# EAGLE board 8266_relay (EAGLE 6.6.0)
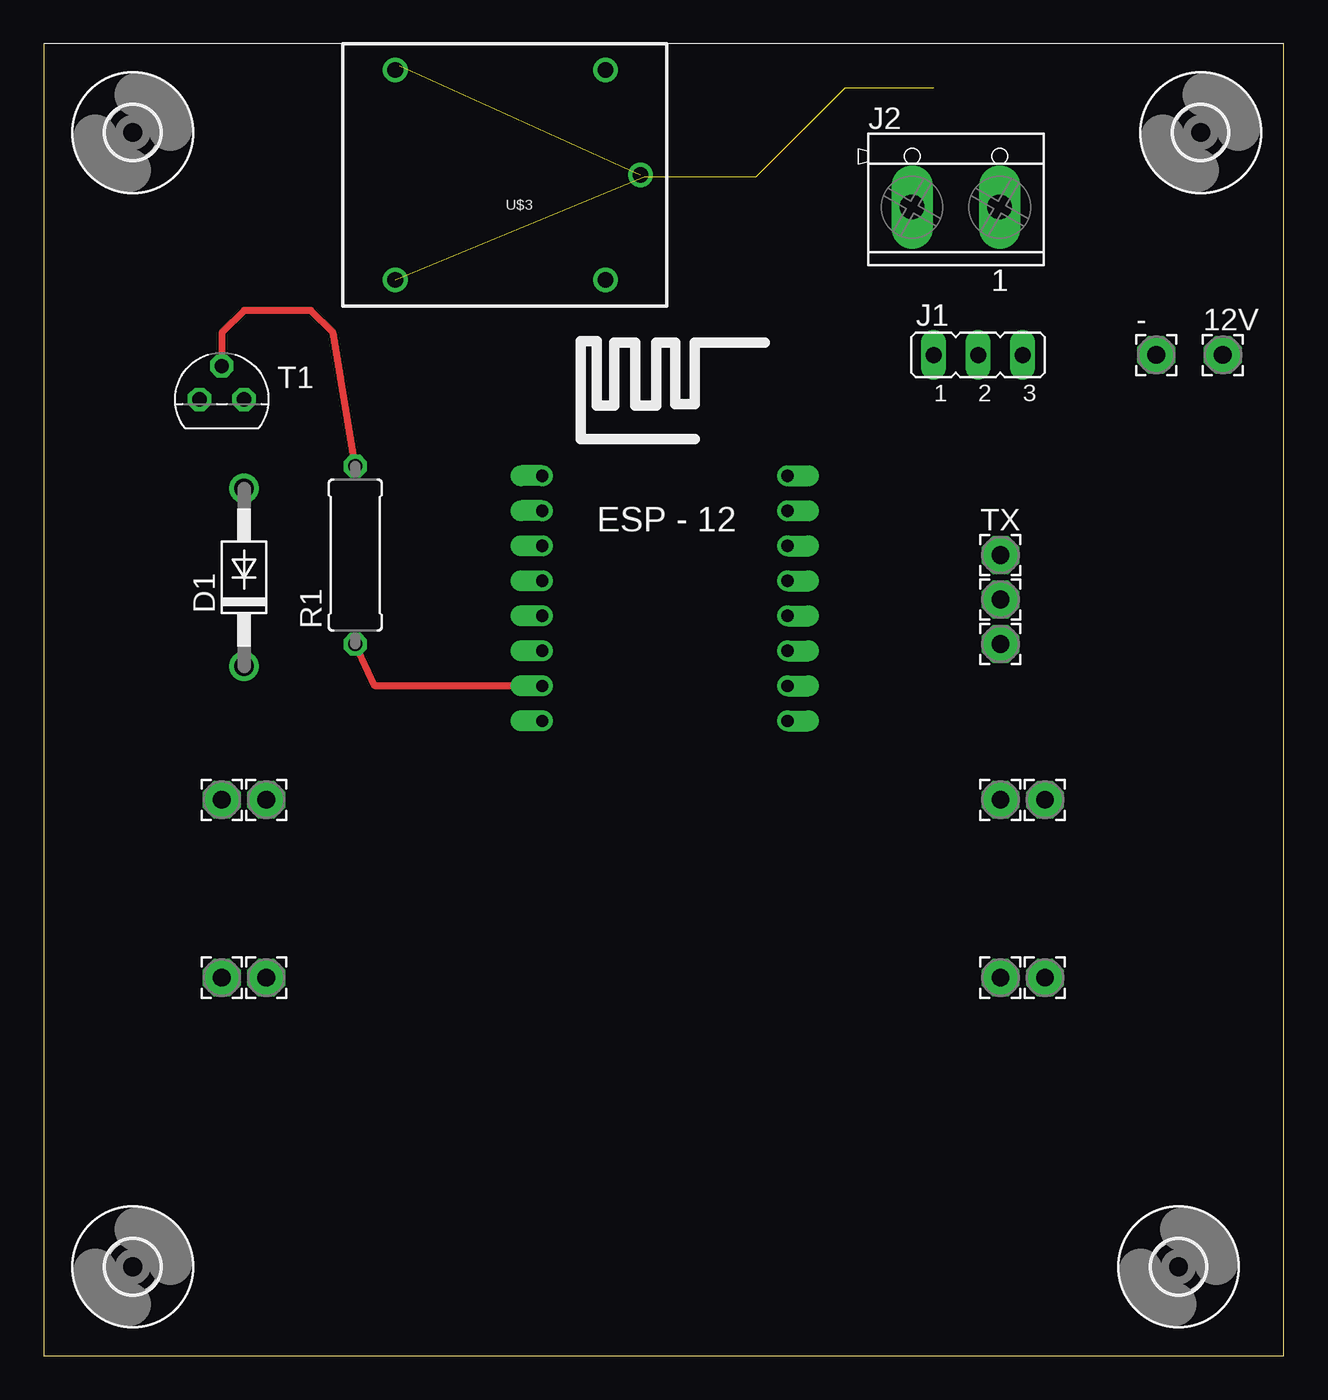
[diagram p0: board, top side]
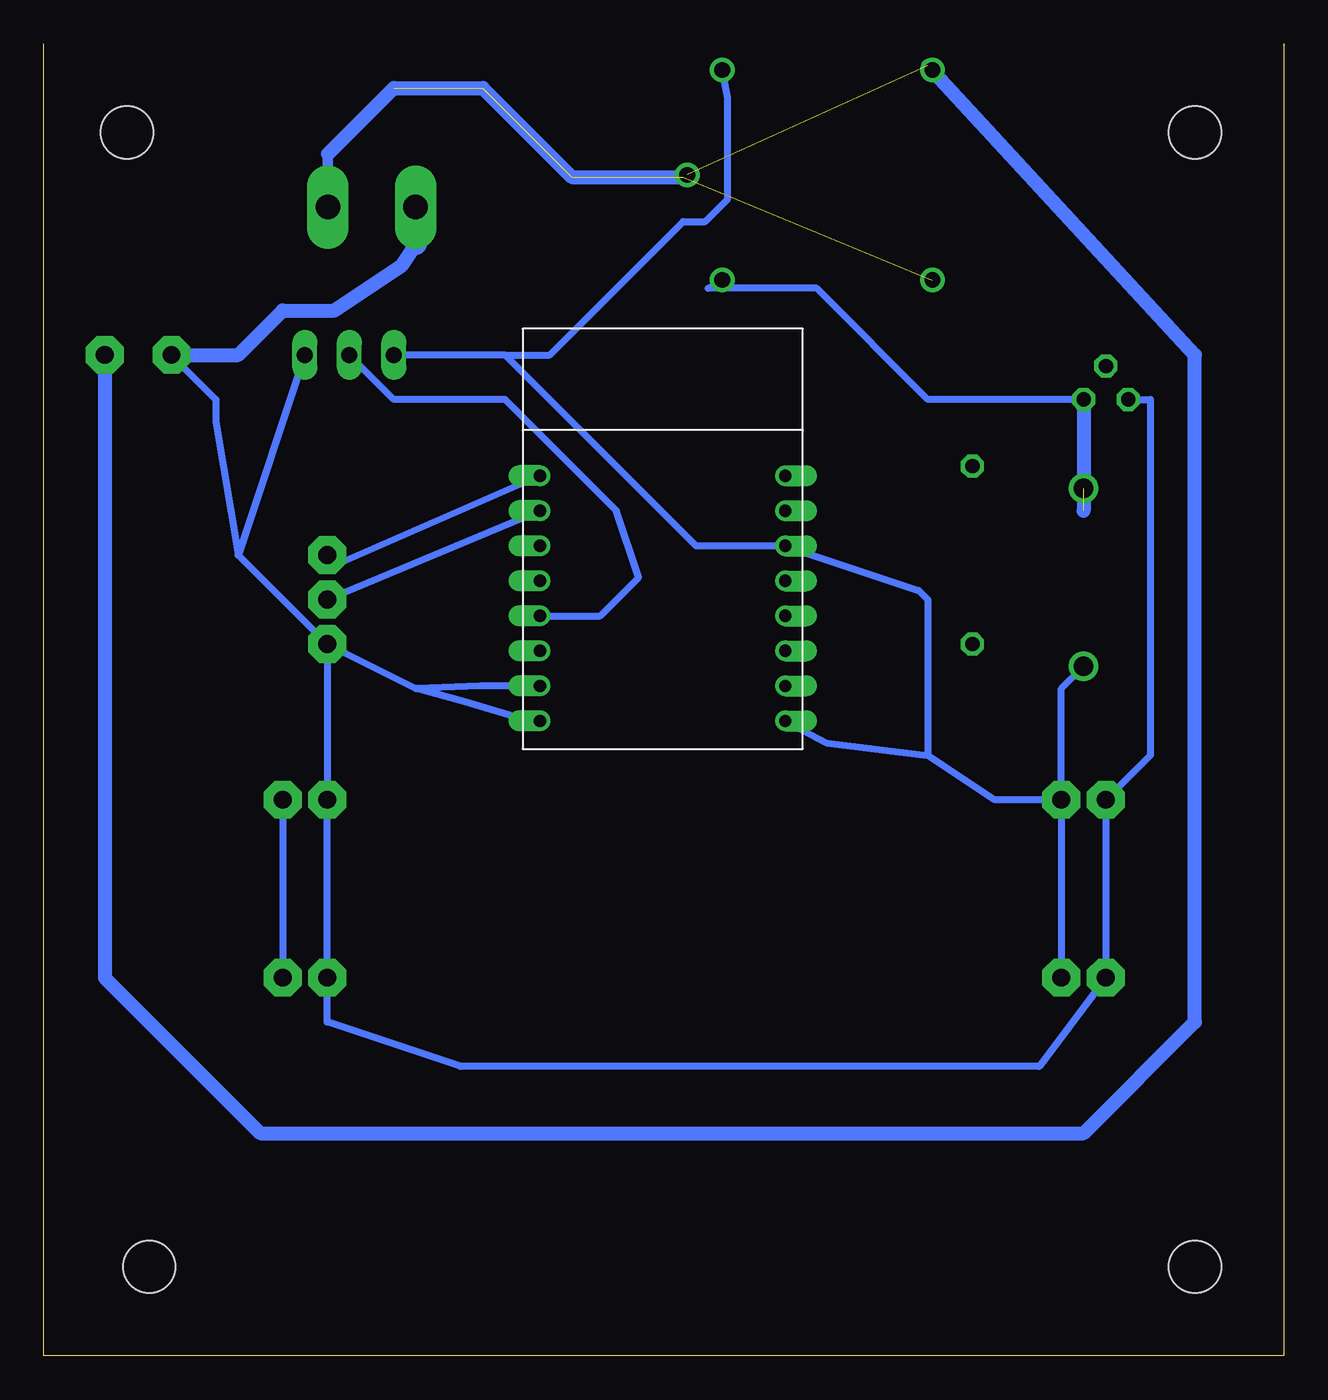
[diagram p1: board, bottom side, seen from below]

Size 70.79 x 74.92 mm. Coordinates in mm from the lower left corner, seen from the top.
Outline: 70.79,74.92 70.79,0 0,0 0,74.92
Copper layers (1*16): Top 0.035mm / dielectric 1.5mm / Bottom 0.035mm
Design rules "default *": minimum track width 10mil, minimum drill 13mil, track to track 8mil, track to pad 8mil, pad to pad 8mil, via to via 8mil, smd to smd 8mil, copper to edge 40mil, drill to drill 8mil, minimum pad ring 10mil, minimum via ring 8mil, stop-mask expansion 4mil, vias tented up to drill 0mil, thermal gap 10mil

## Footprints (pad centres in the part's own frame; a part is rotated, then mirrored left to right if it is on the bottom)
2,15/1,0 = drill 1.016 pad 2.159 octagon: 1 0,0
DO41-10 = drill 1.118: A 5.08,0; C -5.08,0
JP2 = drill 0.914 long: 1 -2.54,0; 2 0,0; 3 2.54,0
TERMINAL_BLOCK_2P_5 = drill 1.4 pad 2.38 long: 1 2.5,-0.45; 2 -2.5,-0.45
0309/10 = drill 0.813 octagon: 1 -5.08,0; 2 5.08,0
TO92 = drill 0.813 octagon: 1 1.27,0; 2 0,1.905; 3 -1.27,0
3,0 = hole 3: 0,0
SRD-05VDC-SL-C = drill 0.9: COIL0 -5.39,-6.12; COIL1 -5.39,5.88; SWCLOSED 6.61,-6.12; SWCOMMON -7.39,-0.12; SWOPEN 6.61,5.88
ESP12 = drill 0.7 offset: ADC -7.1,3.8; CH_PD -7.1,1.8; GND 6.9,-8.2; GPIO0 6.9,-2.2; GPIO2 6.9,-4.2; GPIO4 6.9,1.8; GPIO5 6.9,-0.2; GPIO12 -7.1,-4.2; GPIO13 -7.1,-6.2; GPIO14 -7.1,-2.2; GPIO15 6.9,-6.2; GPIO16 -7.1,-0.2; RESET -7.1,5.8; RX 6.9,3.8; TX 6.9,5.8; VCC -7.1,-8.2

## Placement (x,y rotation side)
3.3V_1  [2,15/1,0]  12.7,21.59 0 top
3.3V_2  [2,15/1,0]  12.7,31.75 0 top
5V  [2,15/1,0]  57.15,31.75 0 top
5V_2  [2,15/1,0]  57.15,21.59 0 top
12V  [2,15/1,0]  67.31,57.15 0 top
-  [2,15/1,0]  63.5,57.15 0 top
D1  1N4004  [DO41-10]  11.43,44.45 90 top
GND  [2,15/1,0]  54.61,31.75 0 top
GND_1  [2,15/1,0]  54.61,21.59 0 top
GND_2  [2,15/1,0]  10.16,21.59 0 top
GND_3  [2,15/1,0]  54.61,40.64 0 top
GND_4  [2,15/1,0]  10.16,31.75 0 top
J1  [JP2]  53.34,57.15 0 top
J2  CON_TERMINAL_BLOCK_02-5MM  [TERMINAL_BLOCK_2P_5]  52.07,66.04 0 top
R1  [0309/10]  17.78,45.72 90 top
RX  [2,15/1,0]  54.61,43.18 0 top
T1  2N3904  [TO92]  10.16,54.61 0 top
TX  [2,15/1,0]  54.61,45.72 0 top
U$1  [3,0]  5.08,69.85 0 top
U$2  [3,0]  5.08,5.08 0 top
U$3  RELAYPTH  [SRD-05VDC-SL-C]  26.67,67.31 180 top
U$4  ESP12  [ESP12]  35.56,44.45 0 top
U$5  [3,0]  64.77,5.08 0 top
U$6  [3,0]  66.04,69.85 0 top

## Library data of the parts
3.3V_1 3.3V_2 5V 5V_2 12V - GND GND_1-GND_4 RX TX = wirepad
D1 = diode
J1 = jumper
J2 = dp_devices
R1 = resistor
T1 = transistor-neu-to92
U$1 U$2 U$5 U$6 = holes
U$3 = SRD-05VDC-SL-C
U$4 = esp8266modules

## Nets
5V: 5V.1 5V_2.1
12V: 12V.1 U$3.SWCOMMON
GND: -.1 GND.1 GND_1.1 GND_2.1 GND_3.1 GND_4.1 J1.3 J2.2 T1.3 U$4.GND U$4.GPIO15
N$1: J1.2 U$4.GPIO0
N$2: U$4.ADC
N$3: R1.1 U$4.GPIO13
N$4: J2.1 U$3.SWOPEN
N$5: 3.3V_1.1 3.3V_2.1 D1.C J1.1 U$3.COIL0 U$4.CH_PD U$4.VCC
N$6: D1.A T1.1 U$3.COIL1
N$7: R1.2 T1.2
RX: RX.1 U$4.RX
TX: TX.1 U$4.TX

## Tracks (layer width: path | path; a pad name or v marks a point on that pad's centre or on a via)
5V
  Bottom 0.406: 5V.1 5V_2.1
12V  (1 unrouted)
  Bottom 0.813: 12V.1 67.31,21.59 58.42,12.7 11.43,12.7 5.08,19.05 5.08,57.15 20.32,73.66
GND
  Bottom 0.406: J1.3 59.69,45.72 | 59.69,45.72 GND_3.1 | GND_3.1 GND.1 GND_1.1 54.61,19.05 46.99,16.51 13.97,16.51 GND_2.1 GND_4.1 7.62,34.29 7.62,54.61 T1.3 | GND_3.1 49.53,38.1 | 49.53,38.1 46.74,37.34 43.11,36.25 U$4.GND | U$4.GPIO15 45.87,38.25 49.53,38.1 | -.1 60.96,54.61 60.96,53.34 59.69,45.72 | J2.2 49.57,64.81 49.53,64.77
  Bottom 0.813: -.1 59.69,57.15 57.15,59.69 54.2,59.69 50.39,62.23 49.53,63.5
  Bottom 1.27: 49.53,64.77 49.53,63.5
N$1
  Bottom 0.406: U$4.GPIO0 39.03,42.25 36.83,44.45 38.1,48.26 44.45,54.61 50.8,54.61 J1.2
N$3
  Top 0.406: U$4.GPIO13 18.9,38.25 R1.1
N$4  (5 unrouted)
  Bottom 0.61: J2.1 54.57,68.62
  Bottom 0.813: 54.57,68.62 50.8,72.39 45.72,72.39 40.64,67.31 34.29,67.31
N$5
  Bottom 0.406: 20.32,34.29 20.32,43.18 20.85,43.71 U$4.CH_PD 33.55,46.25 44.45,57.15 | 3.3V_2.1 3.3V_1.1 | U$4.VCC 26.09,34.98 20.32,34.29 | 3.3V_2.1 16.51,31.75 20.32,34.29 | 44.45,57.15 J1.1 | 44.45,57.15 41.91,57.15 34.29,64.77 33.02,64.77 31.75,66.04 31.75,71.85 U$3.COIL0 | 3.3V_2.1 12.7,38.1 D1.C
N$6  (1 unrouted)
  Bottom 0.406: T1.1 20.32,54.61 26.67,60.96 32.86,60.96 U$3.COIL1
  Bottom 0.813: T1.1 11.43,48.26
N$7
  Top 0.406: R1.2 16.51,58.42 15.24,59.69 11.43,59.69 10.16,58.42 T1.2
RX
  Bottom 0.406: U$4.RX RX.1
TX
  Bottom 0.406: U$4.TX 54.06,45.17 TX.1